# Allegro board USB2CAN-base-0426.brd
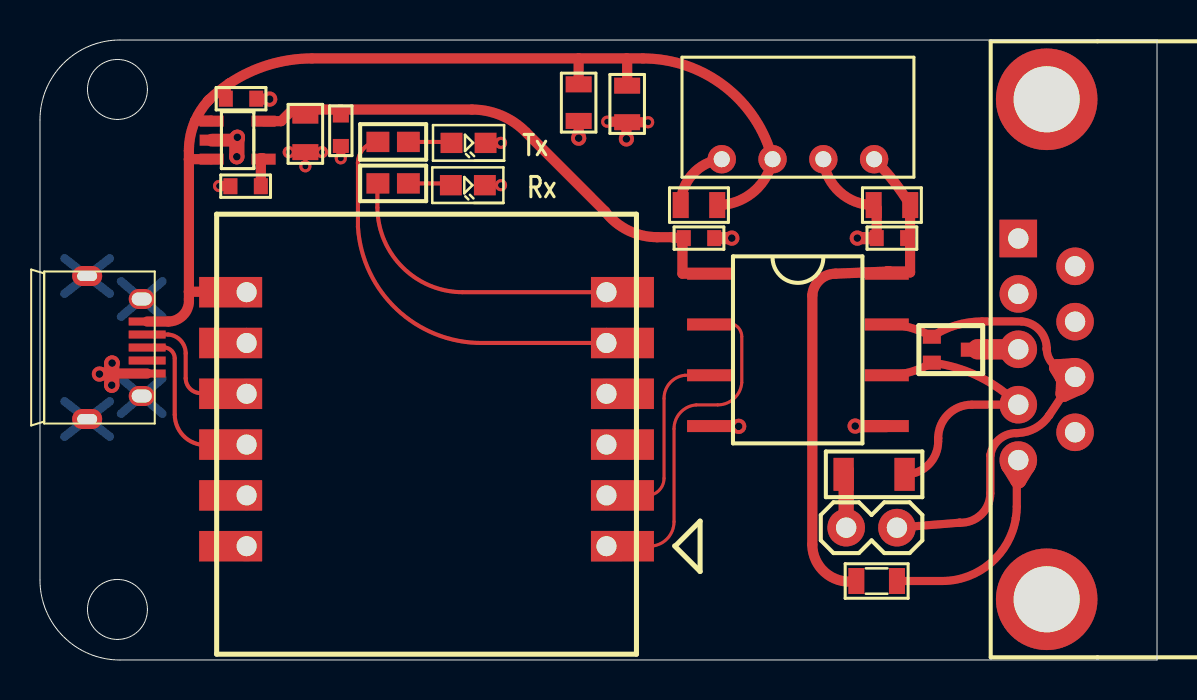
[diagram p0: board, top side]
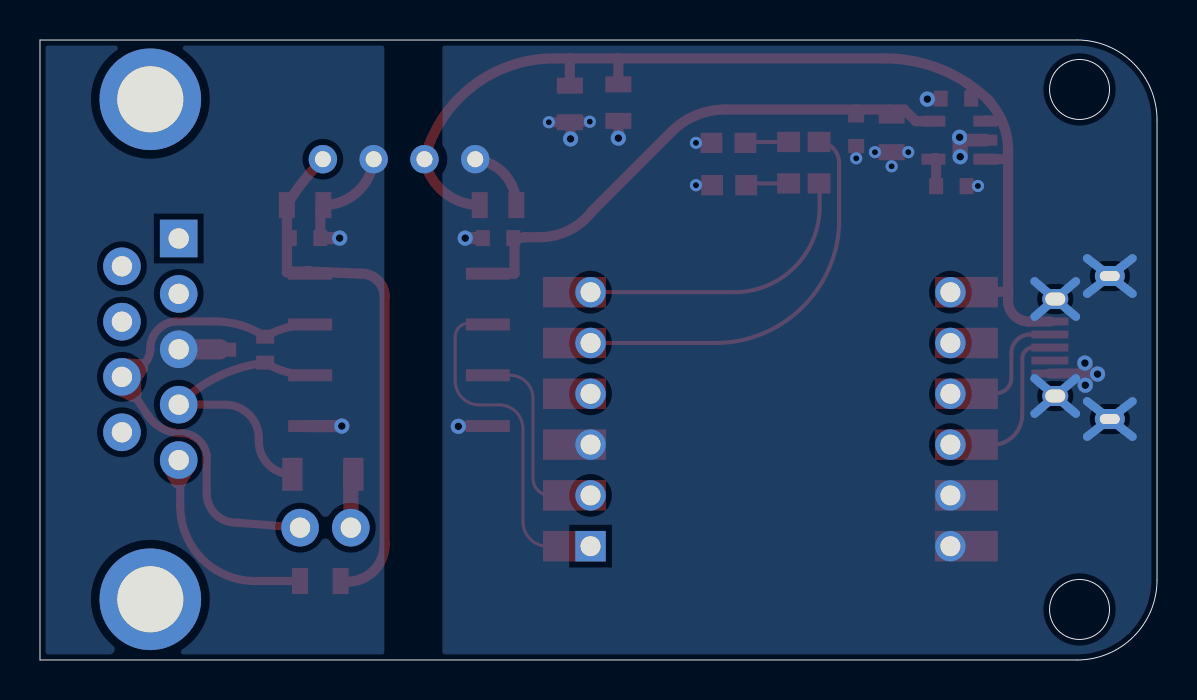
[diagram p1: board, bottom side, seen from below]

Outline 55.88 x 31 mm; copper layers: TOP, BOTTOM. Coordinates in mm from the lower left corner of the outline.
Outline path: circle c3.88,28.53 r1.5 ; circle c3.88,2.53 r1.5 ; 0,27 0,4 arc(1.17,1.17) 4,0 55.88,0 55.88,31 4,31 arc(1.17,29.83) 0,27

## Placement (name value [footprint] x y rotation side)
C2  .10  [C0603-1]  32.96 21.09 0 top
C3  .10  [C0805_2-1]  32.96 22.75 0 top
C4  .10  [C0805_2-1]  29.37 27.8 270 top
C5  .10  [C0805_2-1]  42.62 22.75 0 top
C6  .10  [C0603-1]  42.62 21.09 180 top
C7  .10  [C0805_2-1]  26.94 27.87 270 top
C8  .10  [C0603-1]  10.29 23.69 180 top
C9  .10  [C0603-1]  10.06 28.06 0 top
C10  .10  [C0805_2-1]  13.27 26.31 90 top
C11  .10  [C0603-1]  15.05 26.46 270 top
CON1  -  [MIC_USB-N]  5.36 15.62 270 top
IC1  -  [DUB-R-PDSO-G8-1]  37.91 15.51 270 top
IC2  -  [B0505S_V-1]  37.91 25.04 0 top
IC3  -  [SOT23-5L-1]  9.89 25.99 270 top
LED1  .10  [LED-0603]  21.4 23.74 0 top
LED2  .10  [LED-0603]  21.44 25.86 0 top
Q1  -  [NUP2125-SOT-323]  44.61 15.51 270 top
R1  .10  [C1206]  41.72 9.28 0 top
R2  .10  [R0805-1]  41.85 3.95 0 top
R3  .10  [R0603]  17.67 23.83 270 top
R4  .10  [R0603]  17.67 25.9 270 top
TERM1  .10  [1X02_2-1]  42.87 6.62 180 top
U1  -  [UCAN_M]  8.84 22.29 0 top
X1  -  [DB9_MALE-1]  50.36 15.54 270 top

## Library data of the parts
C2 C6 C8 C9 C11 = C0603-1
C3-C5 C7 C10 = C0805_2-1
CON1 = MIC_USB-N
IC1 = DUB-R-PDS0-G8-1
IC2 = B0505S_V-1
IC3 = SOT23-5L-1
LED1 LED2 = LED-0603
Q1 = NUP2125-SOT-323
R1 = C1206
R2 = R0805-1
R3 R4 = R0603
TERM1 = 1X02_2-1
U1 = UCAN_M
X1 = DB9_MAIL-1

## Footprints (pads in the part's own frame, mm; a bottom-side part is the same pattern mirrored in y, then rotated)
1X02_2-1
  round 1.88 hole 1.016: 1(0,0) 2(2.54,0)
B0505S_V-1
  round 1.422 hole 0.8: 1(-3.81,0) 2(-1.27,0) 3(1.27,0) 4(3.81,0)
C0603-1
  rect 0.7x0.8 smd: 1(-0.762,0) 2(0.762,0)
C0805_2-1
  rect 0.8x1.3 smd: 1(0.914,0) 2(-0.914,0)
C1206
  rect 1.016x1.651 smd: 1(-1.524,0) 2(1.524,0)
DB9_MALE-1
  round 1.88 hole 1.016: 1(5.54,-1.42) 2(2.77,-1.42) 3(0,-1.42) 4(-2.77,-1.42) 6(4.15,1.42) 7(1.38,1.42) 8(-1.38,1.42) 9(-4.15,1.42)
  rect 1.88x1.88 hole 1.016: 5(-5.54,-1.42)
  round 5.08 hole 3.302: G1(-12.5,0) G2(12.5,0)
DUB-R-PDSO-G8-1
  rect 0.6x2.2 smd: 1(-3.81,-4.445) 2(-1.27,-4.445) 3(1.27,-4.445) 4(3.81,-4.445) 5(3.81,4.445) 6(1.27,4.445) 7(-1.27,4.445) 8(-3.81,4.445)
LED-0603
  rect 1.092x1.016 smd: A(-0.851,0) K(0.851,0)
MIC_USB-N
  rect 0.4x1.85 smd: 1(-1.3,0) 2(-0.65,0) 3(0,0) 4(0.65,0) 5(1.3,0)
  oval 1x1.5 hole 0.5x1: 6(-3.575,-3) 7(3.575,-3)
  oval 1x1.3 hole 0.65x1: 10(-2.425,-0.27) 11(2.425,-0.27)
NUP2125-SOT-323
  rect 0.7x0.9 smd: 1(-0.65,0) 2(0.65,0) 3(0,1.9)
R0603
  rect 1.016x1.143 smd: 1(0,0.762) 2(0,-0.762)
R0805-1
  rect 0.8x1.3 smd: 1(-1.016,0) 2(1.016,0)
SOT23-5L-1
  rect 0.55x1.2 smd: 1(-0.95,-1.3) 2(0,-1.3) 3(0.95,-1.3) 4(0.95,1.3) 5(-0.95,1.3)
UCAN_M
  rect 3.15x1.524 hole 1: 1(19.5,-16.6) 2(19.5,-14.06) 3(19.5,-11.52) 4(19.5,-8.98) 5(19.5,-6.44) 6(19.5,-3.9) 7(1.5,-3.9) 8(1.5,-6.44) 9(1.5,-8.98) 10(1.5,-11.52) 11(1.5,-14.06) 12(1.5,-16.6)

## Nets
GND: C2.2 C3.2 C4.1 C7.1 C8.2 C9.2 C10.2 C11.2 CON1.5 CON1.6 CON1.7 CON1.10 CON1.11 IC1.4 IC2.1 IC3.2 LED1.K LED2.K U1.3 U1.11 U1.12
VBUS: C3.1 C4.2 C7.2 C9.1 CON1.1 IC2.2 IC3.1 IC3.3 U1.7
VDD: C2.1 C10.1 C11.1 IC1.1 IC3.5
$$$1: C8.1 IC3.4
$$$2: LED2.A R4.1
$$$3: LED1.A R3.1
$$$14: R2.2 X1.1
$$$18: R1.1 TERM1.2
CANH: IC1.7 Q1.1 TERM1.1 X1.7
CANL: IC1.6 Q1.2 R1.2 X1.2
CANRX: IC1.2 U1.1
CANTX: IC1.3 U1.2
COLDVDD: C5.1 C6.1 IC1.8 IC2.4 R2.1
COLDVSS: C5.2 C6.2 IC1.5 IC2.3 Q1.3 X1.3
DM: CON1.2 U1.9
DP: CON1.3 U1.10
LED_RX: R3.2 U1.6
LED_TX: R4.2 U1.5

Pads without a net: CON1 4; U1 4 8; X1 4 5 6 8 9 G1 G2

## Via types
v1: diameter 0.762, hole 0.381, TOP to BOTTOM, 12 vias
v2: diameter 0.61, hole 0.305, TOP to BOTTOM, 9 vias

## Routing (per net, layer and track width the routed paths; a pad name or vN(x,y) marks a point on that pad's centre or on a via; arc(x,y) is an arc through that point)
GND: length 43.8
  TOP w0.203: C11.2 v2(15.05,25.08) ; v2(23.06,23.74) LED1.K ; v2(13.27,24.69) C10.2 ; C10.2 12.44,25.39 v2(12.44,25.39) ; C10.2 14.11,25.39 v2(14.11,25.39) ; LED2.K 22.29,25.86 v2(23.06,25.86)
  TOP w0.508: v2(8.96,23.7) 9.51,23.7 C8.2 ; IC1.4 34.94,11.7 v1(34.95,11.68) ; 29.45,26.89 C4.1 29.33,26.85 v1(29.33,26.05) ; 29.45,26.89 29.42,26.92 v2(28.37,26.92) ; 29.45,26.89 v2(30.42,26.89) ; CON1.5 2.9,14.32 v1(2.97,14.3) ; v1(26.95,26.09) 26.95,26.95 C7.1 ; 10.82,28.2 C9.2 10.82,28.04 v1(11.49,28.04) ; IC2.1 arc(32.64,24.29) C3.2
  TOP w0.61: v1(34.61,21.09) C2.2
  TOP w0.635: 9.85,25.99 IC3.2
  TOP w0.762: v1(9.87,26.14) 9.85,26.11 v1(9.85,25.16) ; v1(3.59,13.74) 3.59,14.83 v1(3.61,14.85)
  BOTTOM w0.432: CON1.6 3.49,18.32 ; CON1.6 1.23,20.08 ; CON1.6 3.49,20.08 ; CON1.6 1.23,18.32 ; CON1.10 6.12,18.93 ; CON1.10 6.12,17.17 ; CON1.10 4.06,18.93 ; CON1.10 4.06,17.17 ; CON1.11 6.12,12.32 ; CON1.11 4.06,14.08 ; CON1.11 4.06,12.32 ; CON1.11 6.12,14.08 ; 1.23,12.93 CON1.7 ; CON1.7 1.23,11.17 ; CON1.7 3.49,11.17 ; CON1.7 3.49,12.93
VBUS: length 56.4
  TOP w0.508: 26.94,30.08 26.94,30.08 C7.2 ; 26.94,30.08 29.35,30.08 ; 26.94,30.08 13.61,30.08 arc(11.45,29.76) 9.48,28.83 ; IC3.3 8.58,25.04 7.45,25.04 ; 29.35,30.08 29.37,30.06 C4.2 ; 29.35,30.08 30.16,30.08 arc(34.26,28.67) IC2.2 arc(36.63,24.95) 36.6,24.85 arc(35.6,23.33) C3.1 ; 7.45,25.04 7.45,25.47 arc(7.53,26.23) 7.76,26.96 ; 7.45,25.04 7.45,18.41 ; 9.48,28.83 9.47,28.83 9.3,28.65 C9.1 ; 9.48,28.83 arc(8.96,28.45) 8.48,28.03 8.42,27.97 8.42,27.97 8.39,27.94 8.39,27.94 arc(8.04,27.48) 7.76,26.96 ; 7.45,18.41 7.45,18.05 arc(7.45,18) 7.45,17.96 arc(7.15,17.23) 6.42,16.92 CON1.1 ; 7.45,18.41 10.31,18.41 U1.7 ; 7.76,26.96 8.56,26.96 IC3.1
VDD: length 27.4
  TOP w0.127: C10.1 13.27,27.44 13.36,27.52
  TOP w0.508: IC3.5 12.07,26.94 12.65,27.52 15.04,27.52 ; 15.04,27.52 21.6,27.52 arc(23.07,27.23) 24.3,26.4 28.26,22.44 arc(29.42,21.48) 30.88,21.14 31.61,21.14 arc(31.83,21.1) 32.05,21.09 C2.1 32.14,21.03 32.14,19.32 33.38,19.32 IC1.1 ; 15.04,27.52 15.05,27.52 C11.1 ; C10.1 13.31,27.19
$$$1: length 1.6
  TOP w0.508: C8.1 11.05,25.09 11.14,25.09 IC3.4
$$$2: length 2.2
  TOP w0.203: R4.1 20.54,25.9 LED2.A
$$$3: length 2.2
  TOP w0.203: R3.1 20.46,23.83 LED1.A
$$$14: length 13.3
  TOP w0.406: R2.2 45.12,3.95 arc(47.55,4.85) 48.82,7.11 48.82,7.11 arc(48.85,7.39) 48.86,7.67 48.86,8.74 48.93,8.8 arc(48.94,8.87) 48.94,8.93 X1.1
  TOP w0.813: 48.48,9.72 48.94,8.98 49.39,9.72 X1.1 48.48,9.72
$$$18: length 3.1
  TOP w0.762: R1.1 40.2,9.36 40.33,9.49 TERM1.2
CANH: length 31.9
  TOP w0.203: 51.77,14.16 X1.7 51.77,14.16 ; 51.77,14.16 51.65,14.16 51.67,14.15 51.67,14.09 ; 44.62,16.17 Q1.1
  TOP w0.406: 51.12,14.52 51.24,14.18 ; 51.12,14.52 X1.7 arc(51.49,13.74) 51.2,13.31 arc(50.84,12.77) 50.48,12.23 arc(49.8,11.6) 48.91,11.35 48.83,11.35 48.83,11.34 arc(47.98,11.03) 47.54,10.24 47.54,10.23 47.54,8.34 arc(47.08,7.27) 46,6.86 46,6.86 TERM1.1 ; 51.12,14.52 arc(51,14.57) 50.88,14.63 arc(50.51,15.01) 50.36,15.51 50.36,15.57 50.36,15.58 arc(49.99,16.5) 49.1,16.93 47.12,16.93 arc(45.81,16.74) 44.62,16.17 44.62,16.17 ; IC1.7 arc(43.5,16.63) 44.57,16.19 44.57,16.19 44.58,16.18 arc(44.6,16.17) Q1.1
  TOP w0.557: 50.88,14.63 51.12,14.52
  TOP w0.813: X1.7 51.99,13.67 51.2,13.31 51.23,13.89 ; X1.7 51.74,14.69 50.88,14.63 51.17,14.14 ; X1.7 51.32,13.89 ; 51.17,14.14 51.32,13.89 ; 51.17,14.14 51.24,14.18 ; 51.23,13.89 51.32,13.89 ; 51.23,13.89 51.24,14.18 ; 51.32,13.89 51.67,14.09 ; 51.32,13.89 51.24,14.18 ; 51.24,14.18 51.65,14.16
CANL: length 15
  TOP w0.406: R1.2 43.33,9.28 arc(44.47,9.78) 44.93,10.93 44.93,11.09 arc(45.42,12.27) 46.61,12.77 X1.2 arc(47.09,14.11) 44.93,14.82 44.9,14.85 44.59,14.85 ; Q1.2 44.6,14.86 44.59,14.85 44.59,14.85 ; 44.59,14.85 arc(43.52,14.39) IC1.6
CANRX: length 17.7
  TOP w0.152: U1.1 30.48,5.69 arc(31.35,6.04) 31.72,6.91 31.72,11.56 arc(32.04,12.38) 32.83,12.76 33.9,12.76 arc(34.72,13.08) 35.1,13.87 35.1,16.17 arc(34.87,16.68) 34.33,16.83 33.52,16.83 IC1.2
CANTX: length 10.3
  TOP w0.152: IC1.3 32.26,14.24 arc(31.51,13.86) 31.22,13.08 31.22,9.08 arc(30.93,8.44) 30.26,8.23 U1.2
COLDVDD: length 28
  TOP w0.127: 43.52,21.08 43.51,21.09 C6.1
  TOP w0.508: 42.49,19.43 42.43,19.36 42.43,19.32 IC1.8 ; 42.49,19.43 43.48,19.43 43.52,19.38 43.52,22.74 C5.1 arc(42.7,23.95) IC2.4 ; 42.49,19.43 42.49,19.43 ; 42.49,19.43 42.37,19.43 42.37,19.42 ; 42.49,19.43 42.39,19.42 42.37,19.42 ; 42.37,19.42 42.37,19.42 39.79,19.32 arc(39,19) 38.63,18.23 38.63,5.77 arc(39.26,4.38) 40.72,3.93 40.73,3.94 40.77,3.94 40.78,3.95 R2.1
COLDVSS: length 10.4
  TOP w0.203: Q1.3 46.53,15.54 46.89,15.54
  TOP w0.508: C6.2 41.85,22.59 C5.2 arc(40,23.4) IC2.3
  TOP w0.61: v1(40.78,11.7) IC1.5 ; v1(40.89,21.09) C6.2
  TOP w1.016: 46.89,15.54 X1.3
DM: length 7.2
  TOP w0.203: U1.9 10.3,13.35 8.12,13.35 arc(7.54,13.54) 7.29,14.09 7.29,15.34 arc(7.03,15.98) 6.4,16.27 CON1.2
DP: length 9
  TOP w0.203: U1.10 8.52,10.77 arc(7.28,11.11) 6.74,12.27 6.74,15.07 arc(6.6,15.44) 6.26,15.62 CON1.3
LED_RX: length 15.1
  TOP w0.203: R3.2 16.88,23.8 16.88,22.61 arc(18.15,19.62) 21.15,18.39 U1.6
LED_TX: length 20.4
  TOP w0.203: U1.5 22.09,15.85 arc(17.85,17.53) 15.9,21.66 15.9,24.85 arc(16.19,25.58) R4.2

## Copper pours and planes (outline as drawn; the poured copper is in the pictures)
GND on BOTTOM: 35.75,30.59 35.71,30.68 35.62,30.72 4,30.72 1.37,29.63 0.28,27 0.28,4 1.37,1.37 4,0.28 35.62,0.28 35.71,0.32 35.75,0.41 35.75,24.29 35.74,24.33 35.56,24.69 35.5,25.04 35.56,25.39 35.74,25.75 35.75,25.79
COLDVSS on BOTTOM: 55.6,30.59 55.56,30.68 55.47,30.72 52.11,30.72 51.98,30.63 52.03,30.49 52.99,29.42 53.33,28.04 48.97,25.41 48.68,30.49 48.73,30.63 48.61,30.72 38.78,30.72 38.69,30.68 38.65,30.59 38.65,0.41 38.69,0.32 38.78,0.28 48.72,0.28 48.84,0.37 48.78,0.51 47.76,1.59 47.39,3.04 51.8,5.63 51.93,0.51 51.89,0.47 51.87,0.41 51.91,0.32 52,0.28 55.47,0.28 55.56,0.32 55.6,0.41

Small or netless copper shapes (teardrops, artwork), in the pictures only: 5 on TOP

## Text on the board
Board Geometry/Soldermask Top: Ver1.0
Ref Des/Silkscreen Top: Tx | Rx
NCLEGEND-1-2: FIGURE | SIZE | 12.0 | 15.0 | 31.5 | 39.37 | 40.0 | 130.0 | 39.37x19.68 | 39.37x25.59 | DRILL CHART: TOP to BOTTOM | ALL UNITS ARE IN MILS | PLATED | QTY | 9 | 12 | 4 | 11 | 2
